# Altium PCB STLink_V2_Design.PcbDoc
Units mil, origin at the board's own origin, x right, y up, seen from the top; angles counter-clockwise.
Board outline 1960 x 845 mil, 2 copper layers (Top Layer, Bottom Layer); 45 components, 34 nets, 154 pads, 41 vias.
Unrouted connection lines stored in the file: 33.
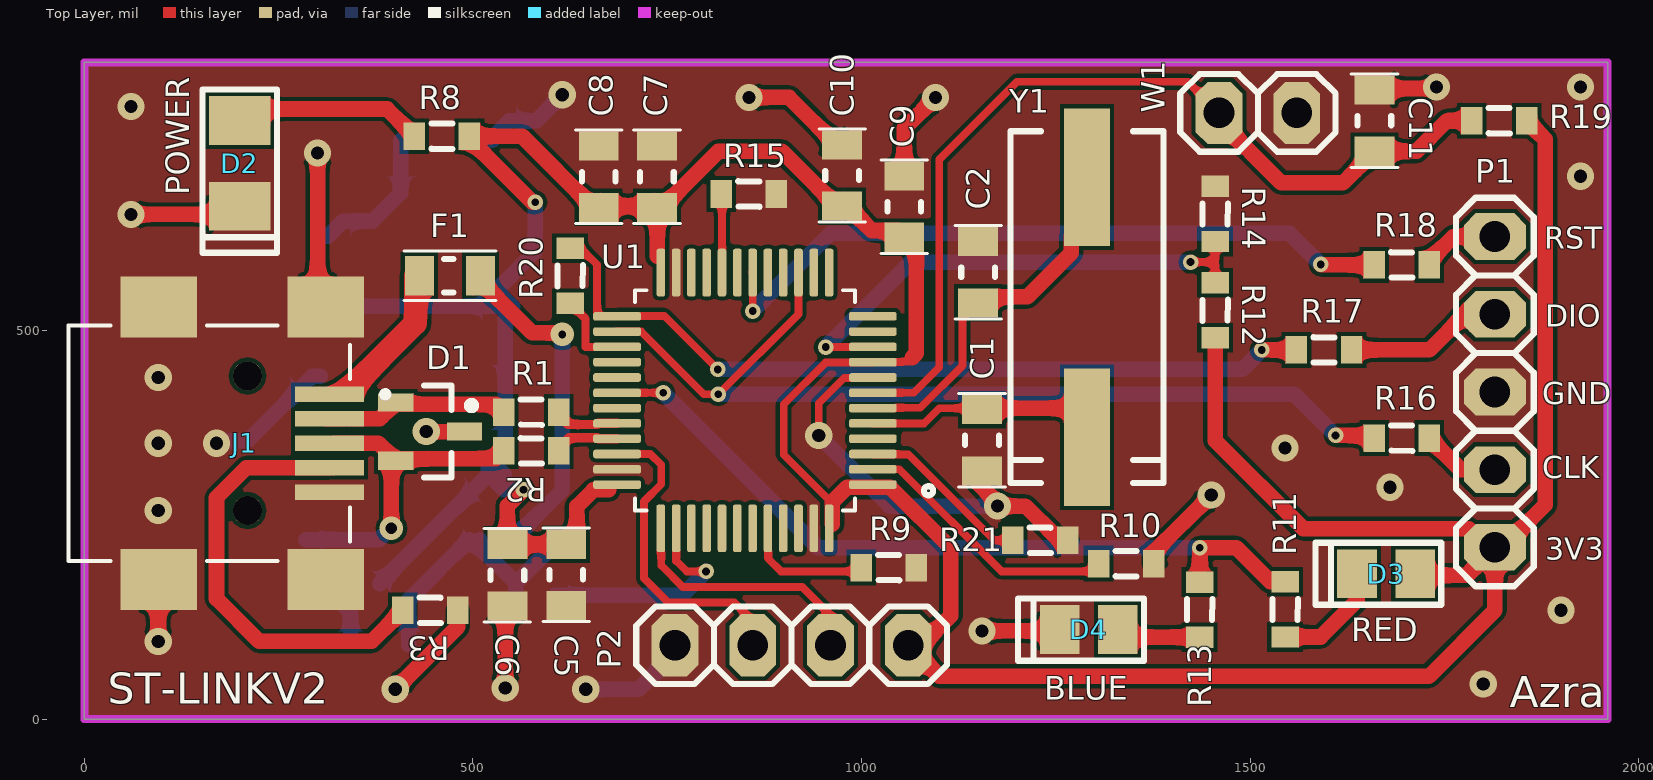
[diagram p0: Top Layer view]
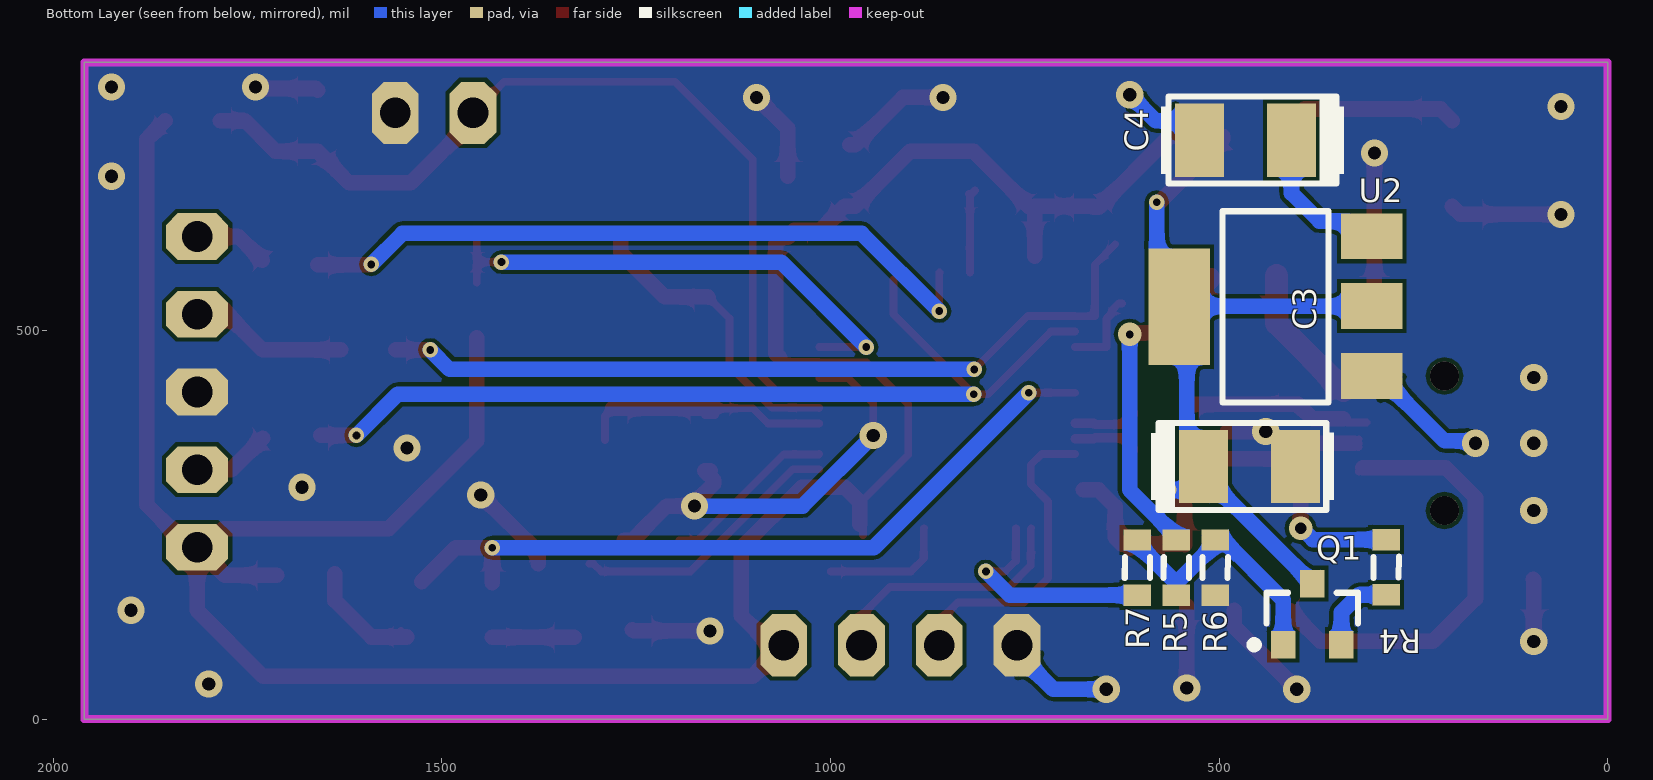
[diagram p1: Bottom Layer view, seen from below]
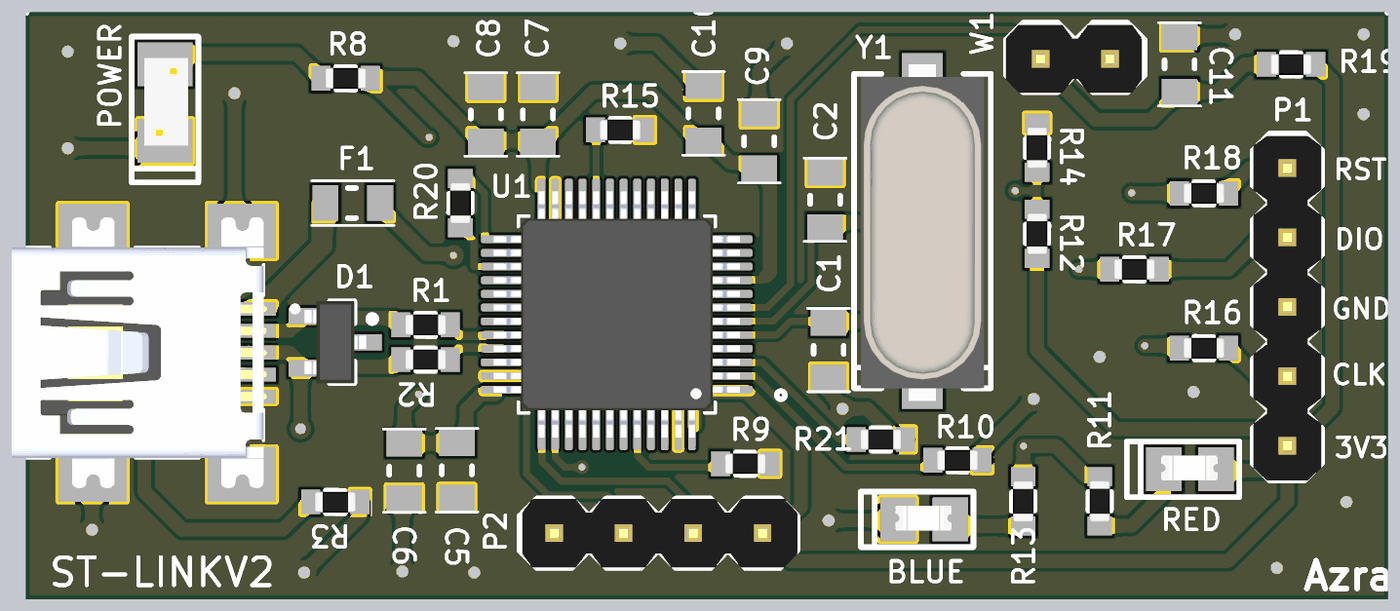
[diagram p2: 3D render of the assembled board from above, using the file's embedded part models]
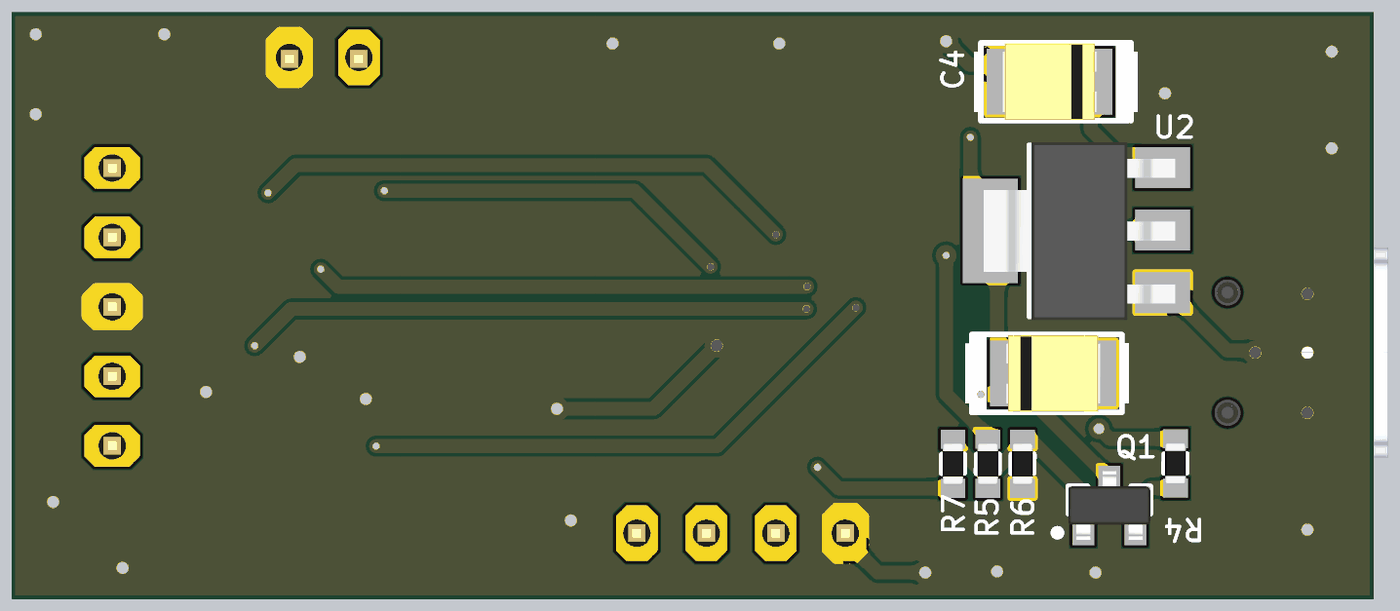
[diagram p3: 3D render of the assembled board from below, using the file's embedded part models]

## Layer stack, top to bottom
Top Solder: solder mask 0.4, Solder Resist, Dk 3.5
Top Layer: signal copper 1.4
Dielectric 1: dielectric 12.6, FR-4, Dk 4.8
Bottom Layer: signal copper 1.4
Bottom Solder: solder mask 0.4, Solder Resist, Dk 3.5

## Board outline
0,0 1960,0 1960,845 0,845

## Design rules (kind name [scope] priority, off if disabled: settings)
Clearance [All] p1: gap=5 ignorepadtopadclearanceinfootprint=FALSE
DiffPairsRouting [All] p1: maxlimit=6 minlimit=5 mostfreqgap=5 toplayer_minwidth=10 toplayer_maxwidth=12 toplayer_prefwidth=10 bottomlayer_minwidth=10 bottomlayer_maxwidth=12 bottomlayer_prefwidth=10 maxuncoupledlength=500
PolygonConnect [All] p1: connectstyle=Direct reliefconductorwidth=10 reliefentries=4 polygonreliefangle="90 Angle" airgapwidth=10
RoutingVias [All] p1: holewidth=15 width=30 viastyle="Through Hole" minholewidth=10 minwidth=20 maxholewidth=20 maxwidth=40
SilkToSilkClearance [All] p1: silktosilkclearance=4
SolderMaskExpansion [All] p1: expansion=4
Width [All] p1: maxlimit=30 minlimit=10 preferedwidth=20
28 further rules are at their usual default settings.

## Classes and differential pairs
differential pair class DiffPairUSB: USB
differential pair USB: +USB_P -USB_N

## Components (designator, comment, footprint, x,y, rotation, side; value= is the part's Value field where it differs from the comment)
C1 "18pF" C805 1154.99,358.86 r90 top
C2 "18pF" C805 1150,575 r270 top
C3 "10uF" MY_SMC_B 460.94,325 r180 bottom
C4 "10uF" MY_SMC_B 465.95,745 r0 bottom
C5 "100nF" C805 620,185.63 r90 top
C6 "100nF" C805 544.29,185 r90 top
C7 "100nF" C805 736.73,697.87 r270 top
C8 "4.7uF" C805 661.73,697.87 r270 top
C9 "10nF" C805 1055,659.37 r270 top
C10 "1uF" C805 975,699.37 r270 top
C11 "100nF" C805 1660,770 r270 top
D1 "TVS DIODE" SOT-23 445,370 r0 top
D2 "RED" MY_LED_1206 205,710 r90 top
D3 "RED" MY_LED_0805 1675,190 r0 top
D4 "BLUE" MY_LED_0805 1292.4,118 r0 top
F1 "=CURRENT" PTC-0805 470,570 r0 top
J1 "Mini USB" MiniUSB 209.94,355 r270 top
P1 "Header 5" My_1X05 1815,420.92 r90 top
P2 "Header 4" My_1X04 910,95 r180 top
Q1 "BC817" SOT23_3 380,135 r90 bottom
R1 "0" R0603 575,395 r0 top
R2 "0" R0603 575,345 r0 top
R3 "100K" R0603 445,140 r0 top
R4 "1K5" R0603 285,195.43 r270 bottom
R5 "10K" R0603 555,195 r90 bottom
R6 "36K" R0603 505,195 r90 bottom
R7 "36K" R0603 605,195 r90 bottom
R8 "1K" R0603 460,750 r180 top
R9 "100K" R0603 1035,195 r180 top
R10 "10K" R0603 1340.43,200 r180 top
R11 "470" R0603 1545,141.08 r270 top
R12 "4K7" R0603 1455,526.14 r270 top
R13 "470" R0603 1435,140.87 r270 top
R14 "4K7" R0603 1455,650 r270 top
R15 "100K" R0603 855,675.63 r180 top
R16 "22R" R0603 1695,361.55 r0 top
R17 "22R" R0603 1595,475 r0 top
R18 "22R" R0603 1695,584.37 r0 top
R19 "100K" R0603 1820.43,770 r0 top
R20 "100K" R0603 625,570.35 r90 top
R21 "10K" R0603 1230,230 r180 top
U1 "STM32F103C8T6" QFP50P900X900X160-48N 850,410 r180 top locked
U2 "LM1117" MY_SOT223 430,530 r90 bottom
W1 "Jumper" My_1X02 1560,780 r0 top
Y1 "8MHz" XTAL-SMD 1290,530 r90 top

## Footprints (in the part's own frame and the unit in brackets; to place one, negate y for a bottom-side part, rotate by r counter-clockwise, add the part's x,y. Pads: shape width x height; smd on the part's side, far side on the other; paste and mask are expansions set on the pad)
C805 [mm]
  rect 0.95x1.3 smd: 1(-1,0) 2(1,0)
  silkscreen extent -1.52,-0.76 1.52,0.76, body extent -1,-0.62 1,0.63, height 0.78
MiniUSB [mm]
  rect 0.5x2.25 smd: 1(-1.6,2.675) 2(-0.8,2.675) 3(0,2.675) 4(0.8,2.675) 5(1.6,2.675)
  rect 2x2.5 smd: SH1(-4.45,2.55) SH2(4.45,2.55) SH3(-4.45,-2.9) SH4(4.45,-2.9)
  round 0.95 hole 0.95 unplated: ""(-2.2,0) ""(2.2,0)
  silkscreen extent -3.85,-5.85 3.85,4.6, body extent -4.95,-5.85 4.95,3.47, height 3.95
My_1X02 [mil]
  oct 60x80 hole 39.37: 1(-100,0) 2(0,0)
  silkscreen extent -150,-50 50,50, body extent -150,-51 46,47, height 323
My_1X04 [mil]
  oct 60x80 hole 39.37: 1(-150,0) 2(-50,0) 3(50,0) 4(150,0)
  silkscreen extent -200,-50 200,50, body extent -200,-49 196,49, height 323
My_1X05 [mil]
  oct 60x80 hole 39.37: 1(-200,0) 2(-100,0) 3(0,0) 4(100,0) 5(200,0)
  silkscreen extent -250,-50 250,50, body extent -250,-49 246,49, height 323
MY_LED_0805 [mm]
  rect 1.3x1.6 smd: A(0.95,-0.076) K(-0.95,-0.076)
  silkscreen extent -2.31,-1.09 1.8,0.94, body extent -1.06,-0.48 1.01,0.42, height 0.86
MY_LED_1206 [mm]
  rect 1.6x2 smd: A(1.527,0.127) K(-1.273,0.127)
  silkscreen extent -2.79,-1.09 2.54,1.35, body extent -1.45,-0.71 1.75,0.89, height 1.12
MY_SMC_B [mm]
  rect 1.6x2.4 smd: +(-1.5,0) -(1.5,0)
  silkscreen extent -3.22,-1.42 2.77,1.42, body extent -1.75,-1.4 1.75,1.4, height 1.93
MY_SOT223 [mil]
  rect 59x79 smd: 1(-88.65,-126.69) 2(1.35,-126.69) 3(91.35,-126.69)
  rect 150x79 smd: 2(0.35,121.31)
  silkscreen extent -123,-71 123,65, body extent -128,-145 128,131, height 66
PTC-0805 [mm]
  rect 0.95x1.3 smd: 1(1.008,0.009) 2(-0.992,0.009)
  silkscreen extent -1.49,-0.8 1.51,0.82, body extent -1.07,-0.67 1.08,0.68, height 0.66
QFP50P900X900X160-48N [mm]
  rrect50% 1.56x0.28 smd: 1(-4.18,2.75) 2(-4.18,2.25) 3(-4.18,1.75) 4(-4.18,1.25) 5(-4.18,0.75) 6(-4.18,0.25) 7(-4.18,-0.25) 8(-4.18,-0.75) 9(-4.18,-1.25) 10(-4.18,-1.75) 11(-4.18,-2.25) 12(-4.18,-2.75) 25(4.18,-2.75) 26(4.18,-2.25) 27(4.18,-1.75) 28(4.18,-1.25) 29(4.18,-0.75) 30(4.18,-0.25) 31(4.18,0.25) 32(4.18,0.75) 33(4.18,1.25) 34(4.18,1.75) 35(4.18,2.25) 36(4.18,2.75)
  rrect50% 0.28x1.56 smd: 13(-2.75,-4.18) 14(-2.25,-4.18) 15(-1.75,-4.18) 16(-1.25,-4.18) 17(-0.75,-4.18) 18(-0.25,-4.18) 19(0.25,-4.18) 20(0.75,-4.18) 21(1.25,-4.18) 22(1.75,-4.18) 23(2.25,-4.18) 24(2.75,-4.18) 37(2.75,4.18) 38(2.25,4.18) 39(1.75,4.18) 40(1.25,4.18) 41(0.75,4.18) 42(0.25,4.18) 43(-0.25,4.18) 44(-0.75,4.18) 45(-1.25,4.18) 46(-1.75,4.18) 47(-2.25,4.18) 48(-2.75,4.18)
  silkscreen extent -6.15,-3.6 3.6,3.6, body extent -4.5,-4.5 4.5,4.5, height 1.6
R0603 [mm]
  rect 0.7x0.9 smd: 1(-0.9,0) 2(0.9,0)
  silkscreen extent -0.34,-0.42 0.34,0.42, body extent -0.76,-0.38 0.76,0.38, height 0.45
SOT23_3 [mm]
  rect 0.9x0.8 smd: 1(-1,0.95) 2(-1,-0.95) 3(1,0)
  silkscreen extent -1.12,-1.5 0.7,2.03, body extent -1.25,-1.5 1.25,1.5, height 1.1
SOT-23 [mm]
  rect 1.15x0.6 smd: 1(-1.125,0.95) 2(-1.125,-0.95) 3(1.125,0)
  silkscreen extent -0.2,-1.5 1.48,1.5, body extent -1.13,-1.5 1.13,1.5, height 1.2
XTAL-SMD [mm]
  rect 4.5x1.5 smd: 1(-4.25,0) 2(4.25,0)
  silkscreen extent -5.75,-2.5 5.75,2.5, body extent -6.21,-2.25 6.09,2.25, height 5.18

## Part data
C1 C2 C5 C6 C7 C8 C9 C10 C11: library part Cap, "Capacitor", Designer="Parsa Malekpour"
C3 C4: library part "Cap Pol", "Polar capacitor", ASiD Part Number=C-AS, Volte=16V
D1: library part SM712
D2 D3 D4: library part LED, "Typical INFRARED GaAs LED", ASiD Part Number=LED-AS
F1: library part PTC, "PTC", PackageReference=6-0805, PackageVersion=Mar-2003, Published=24-Mar-1999
J1: "MINI USB 2.0- B Type Receptacle conn. Right Angle Surface Mount Type", Package=None, Check_prices=https://www.snapeda.com/parts/10033526-N3212LF/Amphenol+FCI/view-part/?ref=eda, MF="Amphenol ICC", MP=10033526-N3212LF, SnapEDA_Link=https://www.snapeda.com/parts/10033526-N3212LF/Amphenol+FCI/view-part/?ref=snap
P1: "Header, 5-Pin", ASiD Part Number="Header 5-AS"
P2: "Header, 4-Pin", ASiD Part Number="Header 4-AS"
Q1: library part bc817-16
R1 R2 R3 R4 R5 R6 R7 R8 R9 R10 R11 R12 R13 R14 R15 R16 R17 R18 R19 R20 R21: library part Resistor, "Resistor", Designer="Parsa Malekpour"
U1: "ARM® Cortex®-M3 STM32F1 Microcontroller IC 32-Bit 72MHz 64KB (64K x 8) FLASH 48-LQFP (7x7)", Package="LQFP-48 STMicroelectronics", Check_prices=https://www.snapeda.com/parts/STM32F103C8T6/STMicroelectronics/view-part/?ref=eda, MF=STMicroelectronics, MP=STM32F103C8T6, SnapEDA_Link=https://www.snapeda.com/parts/STM32F103C8T6/STMicroelectronics/view-part/?ref=snap
U2: "Low Drop Voltage Reg", ASiD Part Number=LM1117-AS
W1: "Jumper Wire", ASiD Part Number=Jumper-AS
Y1: library part XTAL, "Crystal Oscillator", Designer="Parsa Malekpour", Email=Malekpour.parsa@Gmail.com

## Via types
v1: diameter 35, hole 17, Top Layer to Bottom Layer, tented both sides, 22 vias
v2: diameter 20, hole 10, Top Layer to Bottom Layer, tented both sides, 13 vias
v3: diameter 35, hole 17, Top Layer to Bottom Layer, 4 vias
v4: diameter 30, hole 15, Top Layer to Bottom Layer, tented both sides, 1 vias
v5: diameter 30, hole 10, Top Layer to Bottom Layer, tented both sides, 1 vias

## Nets (pads, with @x,y where several pads share a name; then routed paths per layer and width w, separated by ;. In a path a pad name is that pad's centre, name@x,y a point inside that pad or via, vN(x,y) a via of type N, cw(c..) or ccw(c..) an arc to the next point about the centre after c; other vN are vias at no path point)
+3V3: C3.+ C5.2 C6.2 C7.2 C8.2 C9.2 C10.2 D3.A P1.1 P2.1 Q1.3 R8.1 R12.2 R19.2 U1.1 U1.9 U1.24 U1.36 U1.48 U2.2 | length 5083.4
  Top Layer w10: U1.48@958.27,236.73 U1.48 ; 962.2,277.8 900,340 900,405 953.68,458.68 1014.03,458.68 U1.9 1015.08,459.72 1059.72,459.72 1065,465
  Top Layer w20: v2(565,295) 544.29,274.29 C6.2 544.6,224.68 C5.2@619.68,224.68 ; v2(580,665) 576.5,665 495.43,746.06 R8.1 563.35,750 654.84,658.5 C8.2 ; C5.2@615,220 C5.2@619.68,224.68 ; C8.2@661.73,660 737.24,660 C7.2@737.24,658.5 ; 675,295 655,295 633.7,273.7 633.7,233.7 625,225 C5.2 C5.2@619.68,224.68 ; C7.2 C7.2@737.24,658.5 ; U1.24@737.24,595.28 C7.2@737.24,658.5 ; U1.48@962.2,250.43 962.2,277.8 ; 962.2,279.09 981.49,298.39 1036.75,298.39 1115,220.14 1115,133.11 1076.89,95 P2.1 1100,55 1730,55 1815,140 1815,210.92 P1.1@1810,215.92 ; 1065,465 1070.59,470.59 1070.59,611.3 1061.89,620 C9.2 1046.3,628.7 1013.19,628.7 981.89,660 C10.2 968.11,660 897.48,730.63 815.75,730.63 743.62,658.5 C7.2@737.24,658.5 ; R12.2 1455,358.39 1568.46,244.92 1781,244.92 P1.1@1805,220.92 ; D3.A@1712.4,185 1779.08,185 P1.1@1810,215.92 ; R19.2 1880,745.87 1880,275.92 1825,220.92 P1.1 P1.1@1805,220.92 ; P1.1@1805,220.92 P1.1@1810,215.92
  Bottom Layer w20: U2.2@303.31,531.35 U2.2@550.31,531.35 ; Q1.3 520,314.37 C3.+ C3.+@525,330 ; v2(565,295) 540,295 530,305 540,315 C3.+@525,330 ; v2(580,665) 580,601.66 530,551.66 U2.2@550.31,531.35 ; C3.+@525,330 541.5,346.5 541.5,520.54 551.31,530.35 U2.2@550.31,531.35
+5: C4.+ U2.3 | length 194.7
  Bottom Layer w20: U2.3 313.31,621.35 332.81,640.85 370.85,640.85 406.89,676.89 C4.+
+5V: F1.1 R5.2 | length 432.3
  Top Layer w20: F1.1 509.68,563.46 576.22,496.91 613.09,496.91 v5(615,495)
  Bottom Layer w20: R5.2 558.94,230.43 558.94,238.94 615,295 v5(615,495)
AIN: R12.1 R14.2 U1.10 | length 659
  Top Layer w10: v2@955,478.9 U1.10 ; v2(1423.36,588.07) 1455,588.07 ; R12.1 1455,588.07 ; R14.2 1455,588.07
  Bottom Layer w20: v2(953.9,478.68) 1063.29,588.07 v2(1423.36,588.07)
GND: C1.1 C2.1 C3.- C4.- C5.1 C6.1 C7.1 C8.1 C9.1 C10.1 C11.1 D1.3 D2.K D4.K J1.5 J1.SH1 J1.SH2 J1.SH3 J1.SH4 P1.3 P2.4 R3.2 R6.1 R9.1 R10.1 R14.1 R15.1 R21.1 U1.8 U1.23 U1.35 U1.47 U2.1 W1.2 | length 2279.4
  Top Layer w10: v1(945,365) 945,406.2 977.81,439.02 1014.06,439.02 U1.8
  Top Layer w20: v1(60,649.3) 189.42,649.3 D2.K ; v3(95,100) 95,179.04 J1.SH4 ; v1(300,728.39) 300,540.53 J1.SH1 ; v1(400,38.39) 480.43,118.82 R3.2 ; v1(440,370) D1.3 ; v1(541.61,40) C6.1@541.61,145.63 ; v1(855,800) 906.85,800 968.11,738.74 C10.1 ; C9.1 1055,760 v1(1095,800) ; v1(1155,113.39) 1253.39,113.39 D4.K ; C1.1 1161.88,319.49 1150,307.61 1150,303.15 1175,278.15 v1(1175,274.09) 1210.91,274.09 1255,230 R21.1 ; R10.1 1375.87,214.25 v1(1450,288.39) ; C11.1 1662.01,811.38 1737.99,811.38 v1(1740,813.39)
  Bottom Layer w20: v1(170,355) 172.87,357.87 209.83,357.87 293.31,441.35 U2.1 ; C4.- 525,748.3 546.5,769.8 581.41,769.8 v1(615,803.39) ; v1(645,38.39) 713.39,38.39 760,85 P2.4 ; v1(945,365) 1035.91,274.09 v1(1175,274.09)
  other v1: 1900,140 95,268.39 1680,298.39 1545,348.94 95,355 95,439.53 1925,698.39
  other v3: 1800,45 60,788.39 1925,813.39
LED_STAT: R11.1 R13.1 U1.30 | length 987.1
  Top Layer w10: U1.30 v2(744.84,419.84) v2@745,420 ; R13.1@1435,175 R13.1@1435.22,175.22
  Top Layer w20: R13.1@1435.22,175.22 v2(1435.22,220.43) 1482.36,220.43 1526.06,176.73
  Bottom Layer w20: v2(744.84,419.84) 944.25,220.43 v2(1435.22,220.43)
NetD1_1: D1.1 J1.2 R1.1 | length 247
  Top Layer w10: J1.2@310.26,381.5 334.94,381.5 J1.2@339.94,386.5 ; R1.1@529.94,405 539.57,395.38 R1.1 R1.1@539.57,391.44
  Top Layer w20: J1.2@339.94,386.5 379.8,386.5 398.31,405 R1.1@529.94,405
NetD1_2: D1.2 J1.3 R2.1 R4.1 | length 448.9
  Top Layer w10: J1.3@320.33,360.08 325.41,355 J1.3@320.41,350 ; D1.2@395,326.89 D1.2 D1.2@403.11,335 ; R2.1@529.57,335 R2.1
  Top Layer w20: J1.3@325.47,355 378.31,355 D1.2 ; v4(395,245.43) D1.2@395,326.89 ; D1.2@403.11,335 R2.1@529.57,335
  Bottom Layer w20: R4.1 379.14,230.87 v4@395,246.73
NetD2_A: D2.A R8.2 | length 245.3
  Top Layer w20: D2.A D2.A@209.94,780.06 ; D2.A@210,780 D2.A@209.94,780.06 ; R8.2 389.57,785 214.88,785 D2.A@209.94,780.06
NetD3_K: D3.K R11.2 | length 158.1
  Top Layer w10: R11.2 R11.2@1545.22,105.87 ; R11.2@1545,105.87 R11.2@1545.22,105.87 ; R11.2@1553.07,113.72 R11.2@1545.22,105.87
  Top Layer w20: R11.2 1590.65,105.65 1637.6,152.6 D3.K
NetD4_A: D4.A R13.2 | length 128.3
  Top Layer w10: D4.A@1327.4,105.87 1346.85,105.87 D4.A@1349.41,108.43
  Top Layer w20: D4.A@1329.8,105.43 R13.2
NetJ1_4: J1.4 R3.1 | length 577
  Top Layer w10: J1.4 J1.4@320.1,318.66
  Top Layer w20: J1.4 208.5,323.5 170,285 170,155 225,100 369.57,100 R3.1
NetP1_2: P1.2 R16.2 | length 101.4
  Top Layer w20: R16.2 1771.06,320.92 P1.2
NetP1_4: P1.4 R17.2 | length 203.6
  Top Layer w10: P1.4@1776.55,520.92 P1.4
  Top Layer w20: R17.2 1730.63,475 P1.4@1776.55,520.92
NetP1_5: P1.5 R18.2 | length 96.7
  Top Layer w20: R18.2@1730.99,590.36 1761.55,620.92 P1.5
NetQ1_1: Q1.1 R5.1 R6.2 R7.2 | length 349.9
  Bottom Layer w10: R6.2@495,230.87 495.43,230.43 R6.2 R6.2@508.94,230.43 ; R7.2@601.06,230.43 R7.2
  Bottom Layer w20: Q1.1 417.4,153.27 R6.2@495,230.87 ; R6.2@508.94,230.43 508.94,221.06 555,175 ; R5.1 555,175 ; R7.2@601.06,230.43 601.06,221.06 555,175
NetQ1_2: Q1.2 R4.2 | length 123
  Bottom Layer w10: Q1.2@332.48,95.63 342.6,105.75 Q1.2
  Bottom Layer w20: R4.2 320,160 342.6,137.4 Q1.2@342.6,105.75
NetR9_2: R9.2 U1.44 | length 165.6
  Top Layer w10: U1.44 880.04,244.92 880.04,206.26 896.3,190 R9.2@999.57,190
NetR10_2: R10.2 U1.2 | length 354.4
  Top Layer w10: U1.2 1048.58,321.42 1180,190 1295,190 R10.2 R10.2@1310.43,200
NetR15_2: R15.2 U1.20 | length 110.1
  Top Layer w10: R15.2@814.09,680.16 820.47,673.78 U1.20 ; R15.2@820,675.63 R15.2@821.89,675.63
NetR20_1: R20.1 U1.27 | length 107.2
  Top Layer w10: R20.1 628.94,534.91 637.72,526.14 637.72,522.2 644.69,515.23 644.69,478.9 U1.27
NetR21_2: R21.2 U1.3 | length 226
  Top Layer w10: U1.3 1015.08,340.59 1060.16,340.59 1170.75,230 R21.2
NRST: C11.2 R19.1 U1.7 W1.1 | length 1185.5
  Top Layer w10: U1.7 1067.01,419.84 1100,452.83 1100,720 1200,820 1420,820 W1.1 W1.1@1460,770
  Top Layer w20: W1.1@1460,770 1540,690 1619.38,690 C11.2 1714.13,730.63 1753.5,770 R19.1
OSC_IN: C1.2 U1.5 Y1.1 | length 352.1
  Top Layer w10: U1.5 1080.47,380.47 1100,400 C1.2@1148.5,400 ; Y1.1@1280,400 1290,390 Y1.1 Y1.1@1290,358.86 ; C1.2@1148.1,391.34 1161.88,391.34 C1.2 C1.2@1148.1,391.34
  Top Layer w20: C1.2@1148.5,400 Y1.1@1280,400
OSC_OUT: C2.2 U1.6 Y1.2 | length 395.4
  Top Layer w10: U1.6 1015.08,400.67 1075.67,400.67 1130,455 1130,515.63 C2.2 C2.2@1157.64,543.27
  Top Layer w20: C2.2@1157.64,543.27 1213.27,543.27 1270,600 Y1.2@1270,621.69
SWCLK: R16.1 U1.15 U1.26 | length 1216.4
  Top Layer w10: U1.26 716.42,498.58 797.01,417.99 v2(815.75,417.99) 918.9,521.14 U1.15@918.9,565.67
  Top Layer w20: v2(1610,365) R16.1@1656.11,365
  Bottom Layer w20: v2(815.75,417.99) 1557.01,417.99 v2(1610,365)
SWCLK_IN: P2.2 U1.37 | length 330.8
  Top Layer w10: U1.37 742.24,244.92 742.24,197.76 770,170 923.58,170 960,133.58 P2.2
SWDIO: R17.1 R20.2 U1.25 | length 1042
  Top Layer w10: R20.2@633.57,610.87 659.72,584.71 659.72,518.78 660.24,518.27 U1.25 685.94,518.78 746.22,518.78 v2(815,450)
  Top Layer w20: v2(1515,475) R17.1
  Bottom Layer w20: v2(815,450) 1490,450 v2(1515,475)
SWDIO_IN: P2.3 U1.34 | length 417.9
  Top Layer w10: U1.34 728.23,341.1 742.24,327.09 742.24,302.24 720,280 720,181.3 751.3,150 836.3,150 875,111.3 P2.3@875,95
SWRST: R18.1 U1.18 | length 907.4
  Top Layer w10: U1.18 860,574.41 v2(860,525) ; v2(1590.87,585) v2@1591.5,584.37
  Top Layer w20: v2@1591.5,584.37 R18.1
  Bottom Layer w20: v2(860,525) 960,625 1550.87,625 v2(1590.87,585)
USB_EN: R7.1 U1.38 | length 293.7
  Top Layer w10: U1.38 761.42,203.58 775,190 v2(800,190)
  Bottom Layer w20: R7.1 769.57,159.57 v2(800,190)
USB_N: R1.2 U1.32 | length 84.4
  Top Layer w12: R1.2 610.43,391.06 622.37,379.13 659.87,379.13 661.21,380.47 U1.32
USB_P: R2.2 U1.33 | length 85
  Top Layer w12: R2.2 610.43,348.94 623.63,362.13 659.87,362.13 661.21,360.79 U1.33
VBUS: F1.2 J1.1 | length 225
  Top Layer w10: J1.1@315.77,418.5 J1.1 349.7,417.99 J1.1@354.55,422.83
  Top Layer w30: J1.1@339.8,423.03 425.94,509.17 F1.2@425.94,570.35
pads on no net: J1. U1.4 U1.11 U1.12 U1.13 U1.14 U1.16 U1.17 U1.19 U1.21 U1.22 U1.28 U1.29 U1.31 U1.39 U1.40 U1.41 U1.42 U1.43 U1.45 U1.46
copper on no net: | length 292170.9
  Top Layer w1: 6272.5,-1981.31 8208.63,-45.18 ; 6272.5,-1921.31 8148.63,-45.18 ; 6272.5,-1861.31 8088.63,-45.18 ; 6272.5,-1801.31 8028.63,-45.18 ; 6272.5,-1741.31 7968.63,-45.18 ; 6272.5,-1681.31 7908.63,-45.18 ; 6272.5,-1621.31 7848.63,-45.18 ; 6272.5,-1561.31 7788.63,-45.18 ; 6272.5,-1501.31 7728.63,-45.18 ; 6272.5,-1441.31 7668.63,-45.18 ; 6272.5,-1381.31 7608.63,-45.18 ; 6272.5,-1321.31 7548.63,-45.18 ; 6272.5,-1261.31 7488.63,-45.18 ; 6272.5,-1201.31 7428.63,-45.18 ; 6272.5,-1141.31 7368.63,-45.18 ; 6272.5,-1081.31 7308.63,-45.18 ; 6272.5,-1021.31 7248.63,-45.18 ; 6272.5,-961.31 7188.63,-45.18 ; 6272.5,-901.31 7128.63,-45.18 ; 6272.5,-841.31 7068.63,-45.18 ; 6272.5,-781.31 7008.63,-45.18 ; 6272.5,-721.31 6948.63,-45.18 ; 6272.5,-661.31 6888.63,-45.18 ; 6272.5,-601.31 6828.63,-45.18 ; 6272.5,-541.31 6768.63,-45.18 ; 6272.5,-481.31 6708.63,-45.18 ; 6272.5,-421.31 6648.63,-45.18 ; 6272.5,-361.31 6588.63,-45.18 ; 6272.5,-301.31 6528.63,-45.18 ; 6272.5,-241.31 6468.63,-45.18 ; 6272.5,-181.31 6408.63,-45.18 ; 6272.5,-121.31 6348.63,-45.18 ; 6272.5,-61.31 6288.63,-45.18 ; 6310.76,-2003.04 8268.63,-45.18 ; 6370.76,-2003.04 8328.63,-45.18 ; 6430.76,-2003.04 8388.63,-45.18 ; 6490.76,-2003.04 8448.63,-45.18 ; 6550.76,-2003.04 8508.63,-45.18 ; 6610.76,-2003.04 8568.63,-45.18 ; 6670.76,-2003.04 8628.63,-45.18 ; 6730.76,-2003.04 8688.63,-45.18 ; 6790.76,-2003.04 8748.63,-45.18 ; 6850.76,-2003.04 8808.63,-45.18 ; 6910.76,-2003.04 8868.63,-45.18 ; 6970.76,-2003.04 8928.63,-45.18 ; 7030.76,-2003.04 8988.63,-45.18 ; 7090.76,-2003.04 9048.63,-45.18 ; 7150.76,-2003.04 9108.63,-45.18 ; 7210.76,-2003.04 9168.63,-45.18 ; 7270.76,-2003.04 9228.63,-45.18 ; 7330.76,-2003.04 9288.63,-45.18 ; 7390.76,-2003.04 9348.63,-45.18 ; 7450.76,-2003.04 9408.63,-45.18 ; 7510.76,-2003.04 9468.63,-45.18 ; 7570.76,-2003.04 9528.63,-45.18 ; 7630.76,-2003.04 9588.63,-45.18 ; 7690.76,-2003.04 9648.63,-45.18 ; 7750.76,-2003.04 9708.63,-45.18 ; 7810.76,-2003.04 9768.63,-45.18 ; 7870.76,-2003.04 9828.63,-45.18 ; 7930.76,-2003.04 9888.63,-45.18 ; 7990.76,-2003.04 9948.63,-45.18 ; 8050.76,-2003.04 10008.63,-45.18 ; 8110.76,-2003.04 10068.63,-45.18 ; 8170.76,-2003.04 10128.63,-45.18 ; 8230.76,-2003.04 10188.63,-45.18 ; 8290.76,-2003.04 10248.63,-45.18 ; 8350.76,-2003.04 10308.63,-45.18 ; 8410.76,-2003.04 10368.63,-45.18 ; 8470.76,-2003.04 10428.63,-45.18 ; 8530.76,-2003.04 10488.63,-45.18 ; 8590.76,-2003.04 10548.63,-45.18 ; 8650.76,-2003.04 10608.63,-45.18 ; 8710.76,-2003.04 10668.63,-45.18 ; 8770.76,-2003.04 10728.63,-45.18 ; 8830.76,-2003.04 10788.63,-45.18 ; 8890.76,-2003.04 10811.31,-82.5 ; 8950.76,-2003.04 10811.31,-142.5 ; 9010.76,-2003.04 10811.31,-202.5 ; 9070.76,-2003.04 10811.31,-262.5 ; 9130.76,-2003.04 10811.31,-322.5 ; 9190.76,-2003.04 10811.31,-382.5 ; 9250.76,-2003.04 10811.31,-442.5 ; 9310.76,-2003.04 10811.31,-502.5 ; 9370.76,-2003.04 10811.31,-562.5 ; 9430.76,-2003.04 10811.31,-622.5 ; 9490.76,-2003.04 10811.31,-682.5 ; 9550.76,-2003.04 10811.31,-742.5 ; 9610.76,-2003.04 10811.31,-802.5 ; 9670.76,-2003.04 10811.31,-862.5 ; 9691.62,4.6 9791.3,104.28 9911.3,224.28 10031.3,344.28 10151.3,464.28 10271.3,584.28 10391.3,704.28 10511.3,824.28 ; 9691.62,64.6 9731.3,104.28 9851.3,224.28 9971.3,344.28 10091.3,464.28 10211.3,584.28 10331.3,704.28 10451.3,824.28 ; 9691.62,124.6 9791.3,224.28 9911.3,344.28 10031.3,464.28 10151.3,584.28 10271.3,704.28 10391.3,824.28 ; 9691.62,184.6 9731.3,224.28 9851.3,344.28 9971.3,464.28 10091.3,584.28 10211.3,704.28 10331.3,824.28 ; 9691.62,244.6 9791.3,344.28 9911.3,464.28 10031.3,584.28 10151.3,704.28 10271.3,824.28 ; 9691.62,304.6 9731.3,344.28 9851.3,464.28 9971.3,584.28 10091.3,704.28 10211.3,824.28 ; 9691.62,364.6 9791.3,464.28 9911.3,584.28 10031.3,704.28 10151.3,824.28 ; 9691.62,424.6 9731.3,464.28 9851.3,584.28 9971.3,704.28 10091.3,824.28 ; 9691.62,484.6 9791.3,584.28 9911.3,704.28 10031.3,824.28 ; 9691.62,544.6 9731.3,584.28 9851.3,704.28 9971.3,824.28 ; 9691.62,604.6 9791.3,704.28 9911.3,824.28 ; 9691.62,664.6 9731.3,704.28 9851.3,824.28 ; 9691.62,724.6 9791.3,824.28 ; 9691.62,784.6 9731.3,824.28 ; 9730.76,-2003.04 10811.31,-922.5 ; 9731.3,-15.72 9851.3,104.28 9971.3,224.28 10091.3,344.28 10211.3,464.28 10331.3,584.28 10451.3,704.28 10571.3,824.28 ; 9790.76,-2003.04 10811.31,-982.5 ; 9791.3,-15.72 9911.3,104.28 10031.3,224.28 10151.3,344.28 10271.3,464.28 10391.3,584.28 10511.3,704.28 10631.3,824.28 ; 9850.76,-2003.04 10811.31,-1042.5 ; 9851.3,-15.72 9971.3,104.28 10091.3,224.28 10211.3,344.28 10331.3,464.28 10451.3,584.28 10571.3,704.28 10691.3,824.28 ; 9910.76,-2003.04 10811.31,-1102.5 ; 9911.3,-15.72 10031.3,104.28 10151.3,224.28 10271.3,344.28 10391.3,464.28 10511.3,584.28 10631.3,704.28 10751.3,824.28 ; 9970.76,-2003.04 10811.31,-1162.5 ; 9971.3,-15.72 10091.3,104.28 10211.3,224.28 10331.3,344.28 10451.3,464.28 10571.3,584.28 10691.3,704.28 10811.3,824.28 ; 10030.76,-2003.04 10811.31,-1222.5 ; 10031.3,-15.72 10151.3,104.28 10271.3,224.28 10391.3,344.28 10511.3,464.28 10631.3,584.28 10751.3,704.28 10811.3,764.28 ; 10090.76,-2003.04 10811.31,-1282.5 ; 10091.3,-15.72 10211.3,104.28 10331.3,224.28 10451.3,344.28 10571.3,464.28 10691.3,584.28 10811.3,704.28 ; 10150.76,-2003.04 10811.31,-1342.5 ; 10151.3,-15.72 10271.3,104.28 10391.3,224.28 10511.3,344.28 10631.3,464.28 10751.3,584.28 10811.3,644.28 ; 10210.76,-2003.04 10811.31,-1402.5 ; 10211.3,-15.72 10331.3,104.28 10451.3,224.28 10571.3,344.28 10691.3,464.28 10811.3,584.28 ; 10270.76,-2003.04 10811.31,-1462.5 ; 10271.3,-15.72 10391.3,104.28 10511.3,224.28 10631.3,344.28 10751.3,464.28 10811.3,524.28 ; 10330.76,-2003.04 10811.31,-1522.5 ; 10331.3,-15.72 10451.3,104.28 10571.3,224.28 10691.3,344.28 10811.3,464.28 ; 10390.76,-2003.04 10811.31,-1582.5 ; 10391.3,-15.72 10511.3,104.28 10631.3,224.28 10751.3,344.28 10811.3,404.28 ; 10450.76,-2003.04 10811.31,-1642.5 ; 10451.3,-15.72 10571.3,104.28 10691.3,224.28 10811.3,344.28 ; 10510.76,-2003.04 10811.31,-1702.5 ; 10511.3,-15.72 10631.3,104.28 10751.3,224.28 10811.3,284.28 ; 10570.76,-2003.04 10811.31,-1762.5 ; 10571.3,-15.72 10691.3,104.28 10811.3,224.28 ; 10630.76,-2003.04 10811.31,-1822.5 ; 10631.3,-15.72 10751.3,104.28 10811.3,164.28 ; 10690.76,-2003.04 10811.31,-1882.5 ; 10691.3,-15.72 10811.3,104.28 ; 10750.76,-2003.04 10811.31,-1942.5 ; 10751.3,-15.72 10811.3,44.28
  Top Layer w15: 6272.5,104.28 6682.41,104.28 7612.16,104.28 8471.93,104.28 9121.76,104.28 9691.62,104.28 10811.3,104.28 ; 6272.5,224.28 6682.41,224.28 7612.16,224.28 8471.93,224.28 9121.76,224.28 9691.62,224.28 10811.3,224.28 ; 6272.5,344.28 6682.41,344.28 7612.16,344.28 8471.93,344.28 9121.76,344.28 9691.62,344.28 10811.3,344.28 ; 6272.5,464.28 6682.41,464.28 7612.16,464.28 8471.93,464.28 9121.76,464.28 9691.62,464.28 10811.3,464.28 ; 6272.5,584.28 6682.41,584.28 7612.16,584.28 8471.93,584.28 9121.76,584.28 9691.62,584.28 10811.3,584.28 ; 6272.5,704.28 6682.41,704.28 7612.16,704.28 8471.93,704.28 9121.76,704.28 9691.62,704.28 10811.3,704.28 ; 6272.5,824.28 10811.3,824.28 ; 6682.41,944.28 6682.41,-15.72 ; 7612.16,944.28 7612.16,-15.72 ; 8471.93,944.28 8471.93,-15.72 ; 9121.76,944.28 9121.76,-15.72 ; 9691.62,944.28 9691.62,-15.72 ; 6682.41,-15.72 7612.16,-15.72 ; 6682.41,-15.72 6272.5,-15.72 6272.5,944.28 10811.3,944.28 10811.3,-15.72 9691.62,-15.72 ; 7612.16,-15.72 8471.93,-15.72 ; 8471.93,-15.72 9121.76,-15.72 ; 9121.76,-15.72 9691.62,-15.72 ; 6272.5,-2002.5 6272.5,-45.72 10811.31,-45.72 10811.31,-2002.5 6272.5,-2002.5

## Polygon pours and split planes (outlines as drawn)
GND on Top Layer "Top Layer-GND" (solid, remove dead copper, pour order 10): 0,0 1960,0 1960,845 0,845
GND on Bottom Layer "Bottom Layer-GND" (solid, remove dead copper, pour order 11): 0,0 1960,0 1960,845 0,845

## Keep-outs
Keep-Out Layer:
  lines w5: -2.5,0 ccw(c0,0) 0,-2.5 ; -2.5,0 ccw(c0,0) 0,-2.5 ; -2.5,0 -2.5,845 ; -2.5,845 cw(c0,845) 0,847.5 ; -2.5,845 cw(c0,845) 0,847.5 ; 0,-2.5 1960,-2.5 ; 0,847.5 1960,847.5 ; 1960,-2.5 ccw(c1960,0) 1962.5,0 ; 1960,-2.5 ccw(c1960,0) 1962.5,0 ; 1960,847.5 cw(c1960,845) 1962.5,845 ; 1960,847.5 cw(c1960,845) 1962.5,845 ; 1962.5,0 1962.5,845
  lines w10: 0,0 0,845 1960,845 1960,20 1960,0 0,0

## Other copper
Top Layer:
  text "Layer" at 6332.5,854.28 h60
  text "Name" at 6742.41,854.28 h60
  text "Material" at 7672.16,854.28 h60
  text "Thickness" at 8531.93,854.28 h60
  text "Constant" at 9181.76,854.28 h60
  text "Board Layer Stack" at 9751.62,854.28 h60
  text "1" at 6332.5,734.28 h60
  text "Top Overlay" at 6742.41,734.28 h60
  text "2" at 6332.5,614.28 h60
  text "Top Solder" at 6742.41,614.28 h60
  text "Solder Resist" at 7672.16,614.28 h60
  text "0,40mil" at 8531.93,614.28 h60
  text "3,5" at 9181.76,614.28 h60
  text "3" at 6332.5,494.28 h60
  text "Top Layer" at 6742.41,494.28 h60
  text "Copper" at 7672.16,494.28 h60
  text "1,40mil" at 8531.93,494.28 h60
  text "4" at 6332.5,374.28 h60
  text "Dielectric 1" at 6742.41,374.28 h60
  text "FR-4" at 7672.16,374.28 h60
  text "12,60mil" at 8531.93,374.28 h60
  text "4,8" at 9181.76,374.28 h60
  text "5" at 6332.5,254.28 h60
  text "Bottom Layer" at 6742.41,254.28 h60
  text "Copper" at 7672.16,254.28 h60
  text "1,40mil" at 8531.93,254.28 h60
  text "6" at 6332.5,134.28 h60
  text "Bottom Solder" at 6742.41,134.28 h60
  text "Solder Resist" at 7672.16,134.28 h60
  text "0,40mil" at 8531.93,134.28 h60
  text "3,5" at 9181.76,134.28 h60
  text "7" at 6332.5,14.28 h60
  text "Bottom Overlay" at 6742.41,14.28 h60

## Silkscreen, mask and mechanical layers (free items; w line width, h text height)
Top Overlay:
  lines w10: 2055.92,792.53 2075.57,852.64 ; 2060.21,67.52 2080.57,7.64 ; 2065.57,852.58 2085.57,852.7 ; 2070.57,7.58 2090.57,7.7 ; 2075.93,791.03 2075.57,852.64 ; 2080.2,69.26 2080.57,7.64 ; 2095.92,792.76 2075.57,852.64 ; 2100.21,67.76 2080.57,7.64
  text "845.015 (mil)" at 2040,780.81 h60 r270.34
  text "POWER" at 135,673.78 h30 r90
  text "RST" at 1878.66,605.28 h28
  text "DIO" at 1880,505 h28
  text "GND" at 1875.73,405 h28
  text "CLK" at 1875.73,310 h28
  text "3V3" at 1880,205 h28
  text "RED" at 1630,100 h30
  text "BLUE" at 1235,25 h30
  text "ST-LINKV2" at 30,20 h40
  text "Azra" at 1834,15 h40
Drill Drawing:
  circle w10: c98.12,1685.83 r33.33
  lines w10: 64.79,1369.17 81.46,1369.17 98.12,1352.5 114.79,1369.17 131.46,1369.17 114.79,1385.83 131.46,1402.5 114.79,1402.5 98.12,1419.17 81.46,1402.5 64.79,1402.5 81.46,1385.83 64.79,1369.17 ; 64.79,1569.17 131.46,1569.17 98.12,1502.5 64.79,1569.17 ; 64.79,1802.5 131.46,1802.5 131.46,1869.17 64.79,1869.17 64.79,1802.5 ; 64.79,1952.5 98.12,1969.17 131.46,1952.5 114.79,1985.83 131.46,2019.17 98.12,2002.5 64.79,2019.17 81.46,1985.83 64.79,1952.5
  lines w15: 5,1307.5 10825.98,1307.5 ; 5,2057.5 10825.98,2057.5 ; 555.87,1157.5 555.87,2207.5 ; 1095.74,1157.5 1095.74,2207.5 ; 2215.41,1157.5 2215.41,2207.5 ; 2721.28,1157.5 2721.28,2207.5 ; 3455.09,1157.5 3455.09,2207.5 ; 4954.64,1157.5 4954.64,2207.5 ; 5544.49,1157.5 5544.49,2207.5 ; 6290.28,1157.5 6290.28,2207.5 ; 7260.01,1157.5 7260.01,2207.5 ; 8113.77,1157.5 8113.77,2207.5 ; 9447.38,1157.5 9447.38,2207.5 ; 5,1157.5 10825.98,1157.5 10825.98,2207.5 5,2207.5 5,1157.5
  text "Symbol" at 95,2102.5 h72
  text "Count" at 600.87,2102.5 h72
  text "Hole Size" at 1140.74,2102.5 h72
  text "Plated" at 2260.41,2102.5 h72
  text "Hole Type" at 2766.28,2102.5 h72
  text "Drill Layer Pair" at 3500.09,2102.5 h72
  text "Via/Pad" at 4999.64,2102.5 h72
  text "Pad Shape" at 5589.49,2102.5 h72
  text "Template" at 6335.28,2102.5 h72
  text "Description" at 7305.01,2102.5 h72
  text "Hole Tolerance (+)" at 8158.77,2102.5 h72
  text "Hole Tolerance (-)" at 9492.38,2102.5 h72
  text "1" at 600.87,1952.5 h60
  text "15,00mil (0,381mm)" at 1140.74,1952.5 h60
  text "PTH" at 2260.41,1952.5 h60
  text "Round" at 2766.28,1952.5 h60
  text "Top Layer - Bottom Layer" at 3500.09,1952.5 h60
  text "Via" at 4999.64,1952.5 h60
  text "Rounded" at 5589.49,1952.5 h60
  text "v76h38m0mx0" at 6335.28,1952.5 h60
  text "2" at 600.87,1802.5 h60
  text "37,40mil (0,950mm)" at 1140.74,1802.5 h60
  text "NPTH" at 2260.41,1802.5 h60
  text "Round" at 2766.28,1802.5 h60
  text "Top Layer - Bottom Layer" at 3500.09,1802.5 h60
  text "Pad" at 4999.64,1802.5 h60
  text "Rounded" at 5589.49,1802.5 h60
  text "c95hn95" at 6335.28,1802.5 h60
  text "11" at 600.87,1652.5 h60
  text "39,37mil (1,000mm)" at 1140.74,1652.5 h60
  text "PTH" at 2260.41,1652.5 h60
  text "Round" at 2766.28,1652.5 h60
  text "Top Layer - Bottom Layer" at 3500.09,1652.5 h60
  text "Pad" at 4999.64,1652.5 h60
  text "Octagonal" at 5589.49,1652.5 h60
  text "r203_152h100c50" at 6335.28,1652.5 h60
  text "14" at 600.87,1502.5 h60
  text "10,00mil (0,254mm)" at 1140.74,1502.5 h60
  text "PTH" at 2260.41,1502.5 h60
  text "Round" at 2766.28,1502.5 h60
  text "Top Layer - Bottom Layer" at 3500.09,1502.5 h60
  text "Via" at 4999.64,1502.5 h60
  text "Rounded" at 5589.49,1502.5 h60
  text "(Mixed)" at 6335.28,1502.5 h60
  text "26" at 600.87,1352.5 h60
  text "17,00mil (0,432mm)" at 1140.74,1352.5 h60
  text "PTH" at 2260.41,1352.5 h60
  text "Round" at 2766.28,1352.5 h60
  text "Top Layer - Bottom Layer" at 3500.09,1352.5 h60
  text "Via" at 4999.64,1352.5 h60
  text "Rounded" at 5589.49,1352.5 h60
  text "(Mixed)" at 6335.28,1352.5 h60
  text "54 Total" at 600.87,1202.5 h60

## Dimensions
0,845 to 1960,845 on Top Overlay